# EAGLE board ANAL_2_CPU_REV_1_0B (EAGLE 7.6.0)
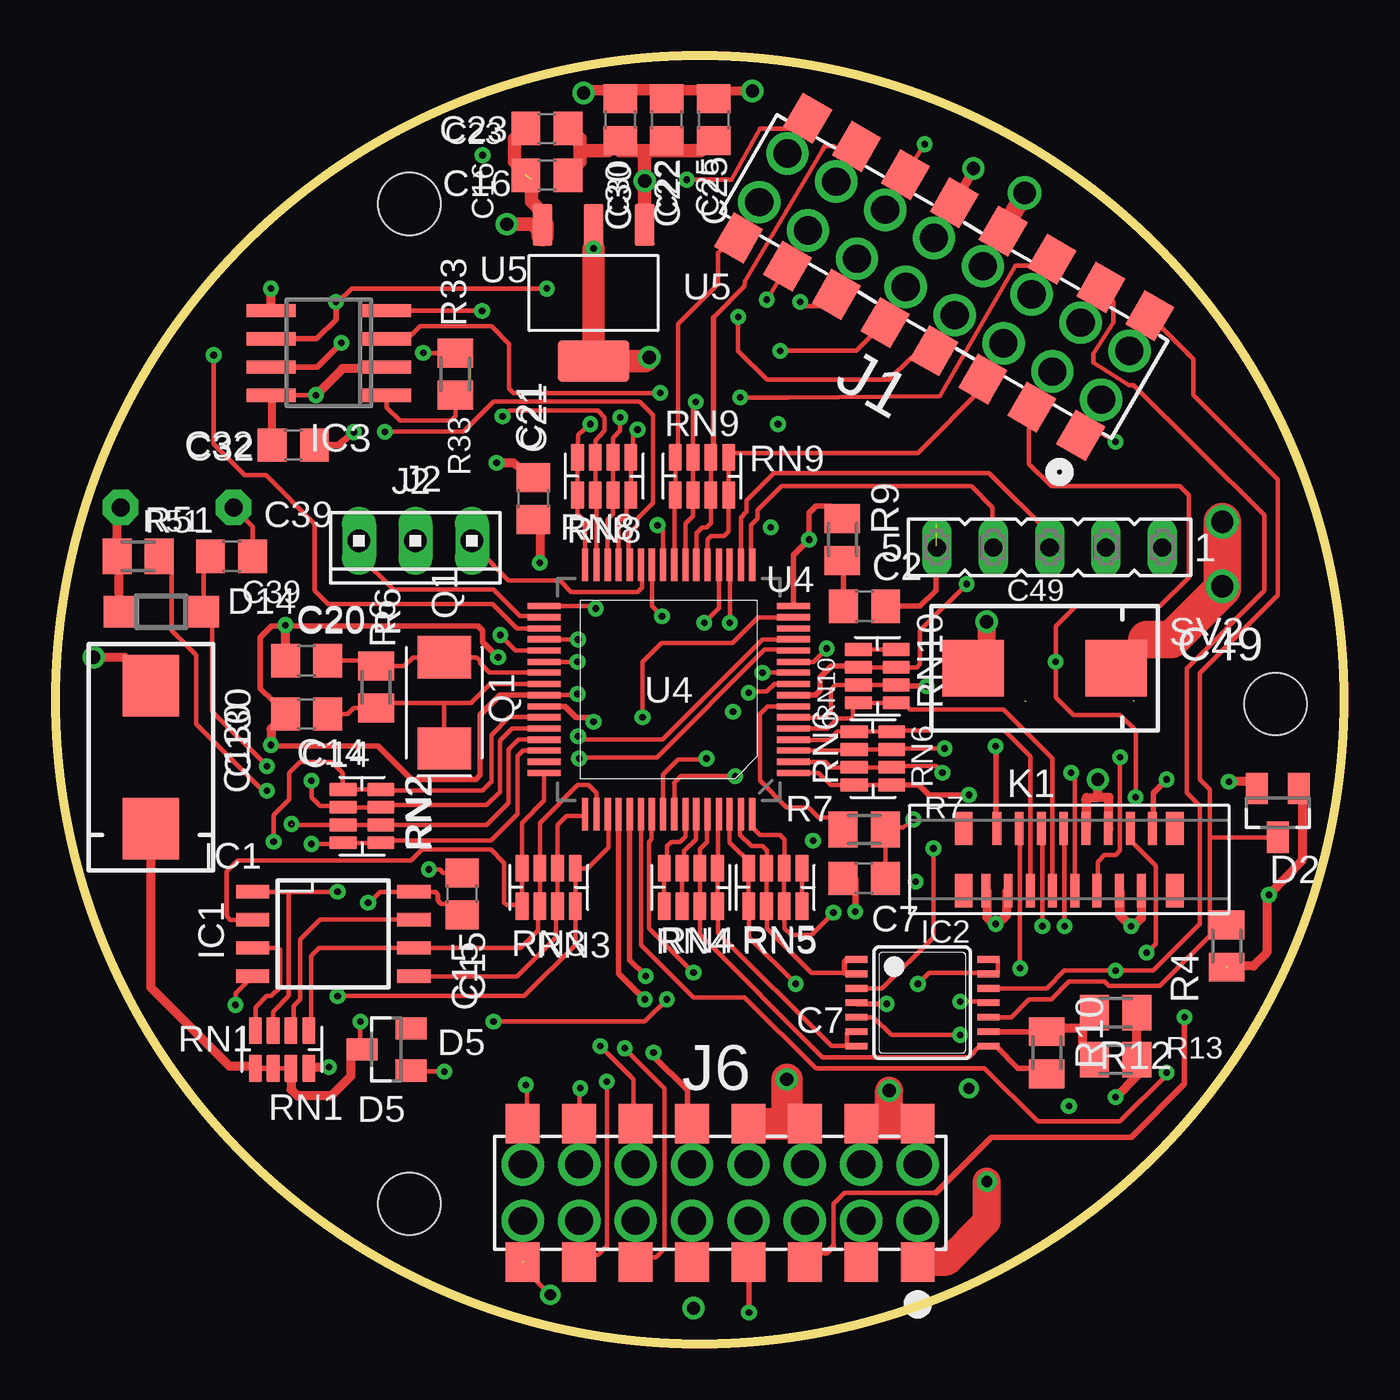
[diagram p0: board, top side]
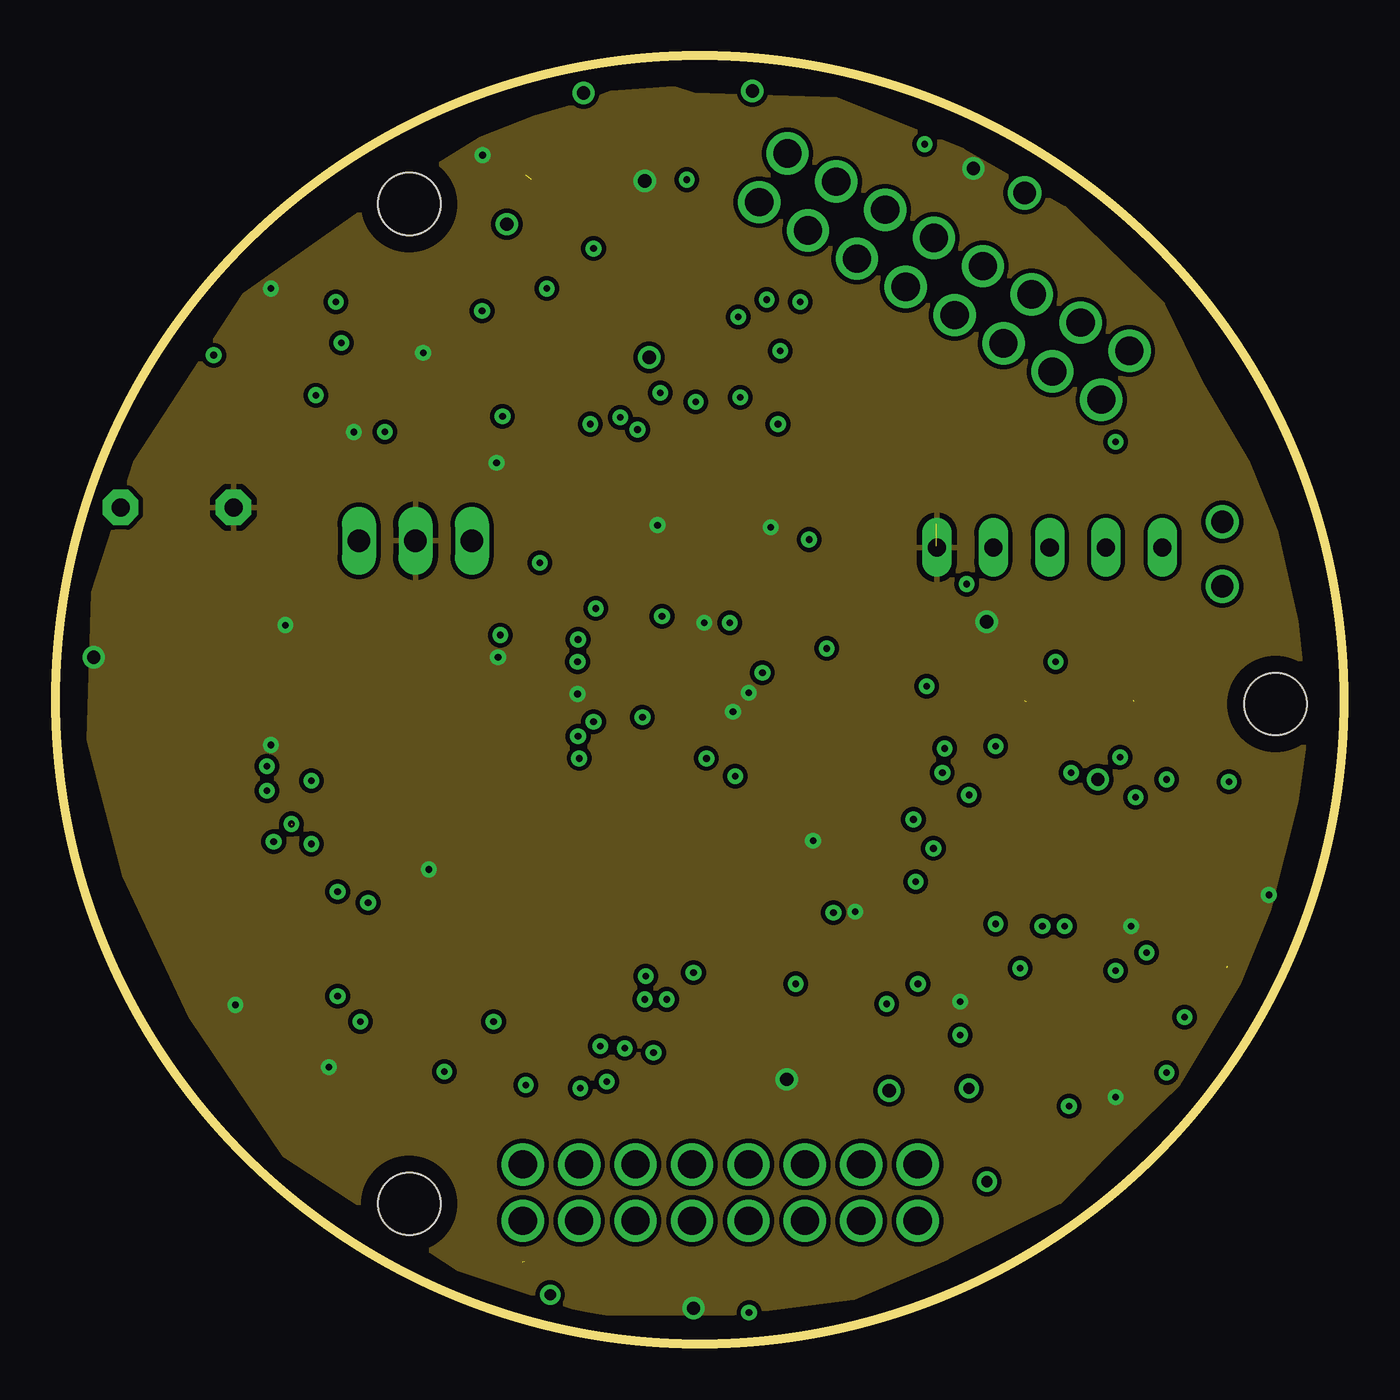
[diagram p1: board, inner layer GND]
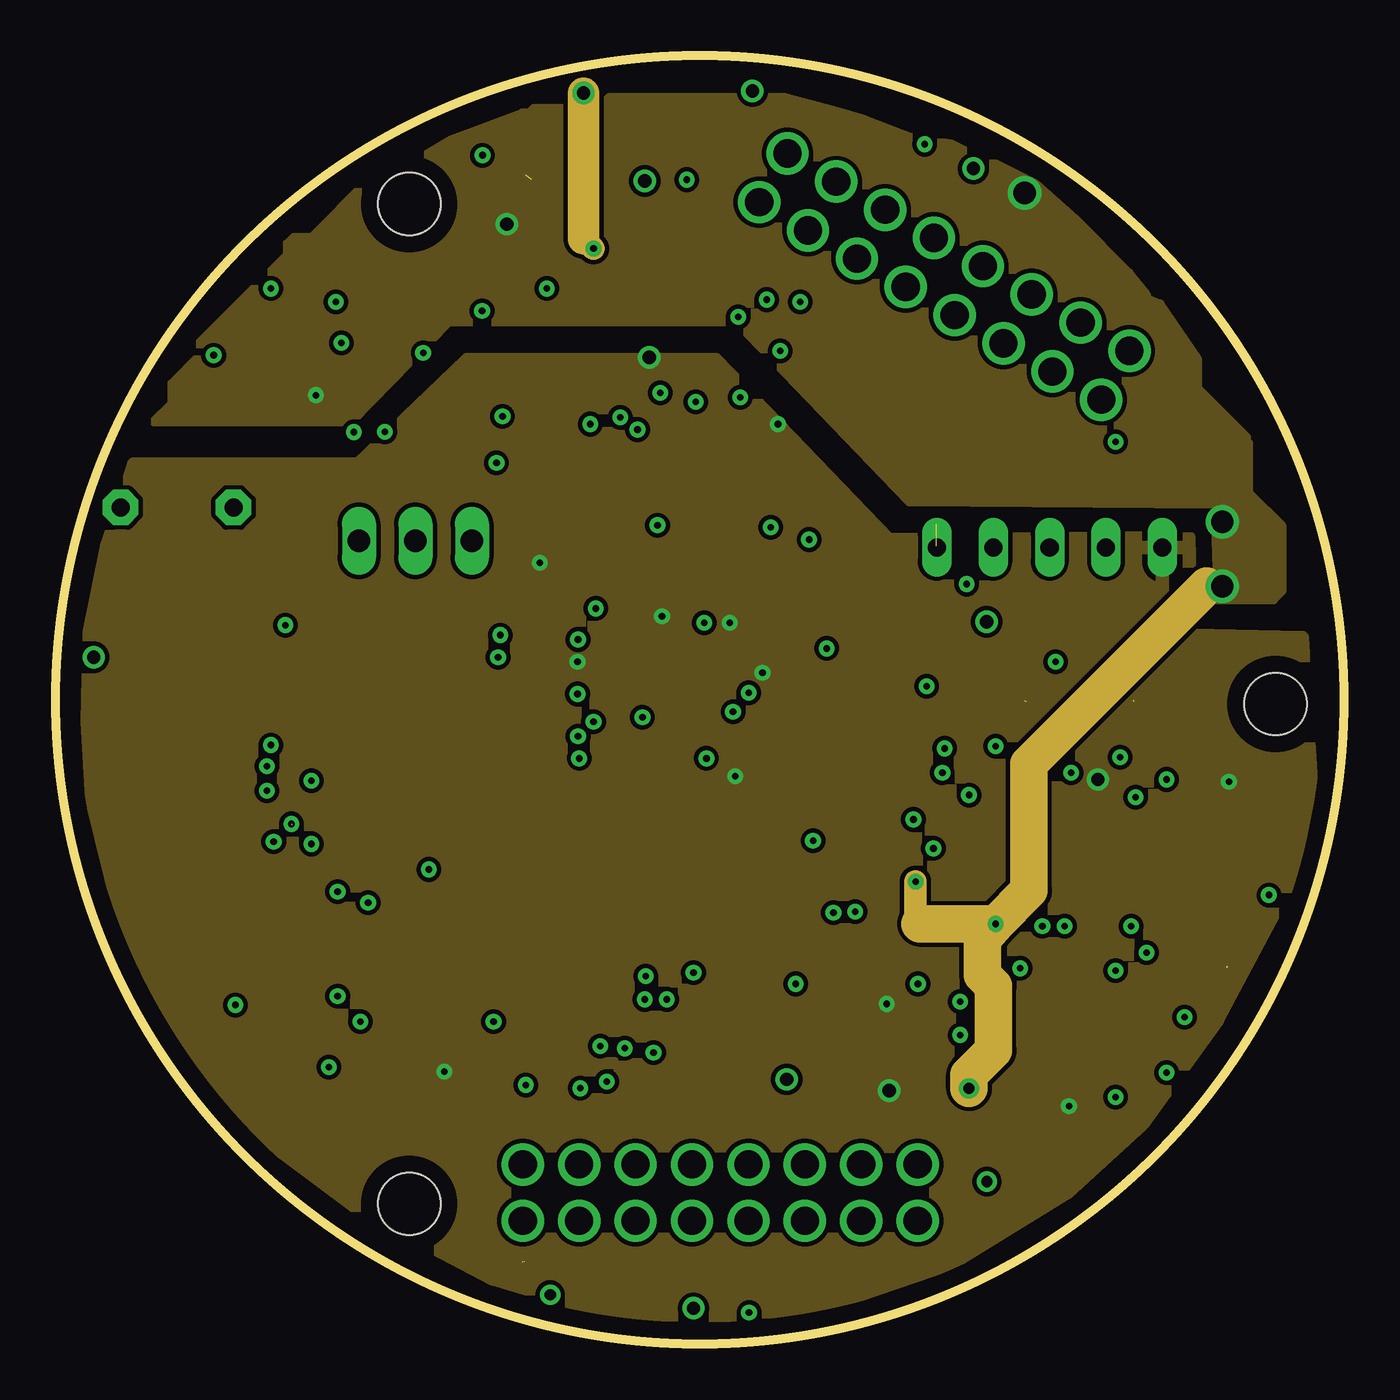
[diagram p2: board, inner layer 3V3&5V]
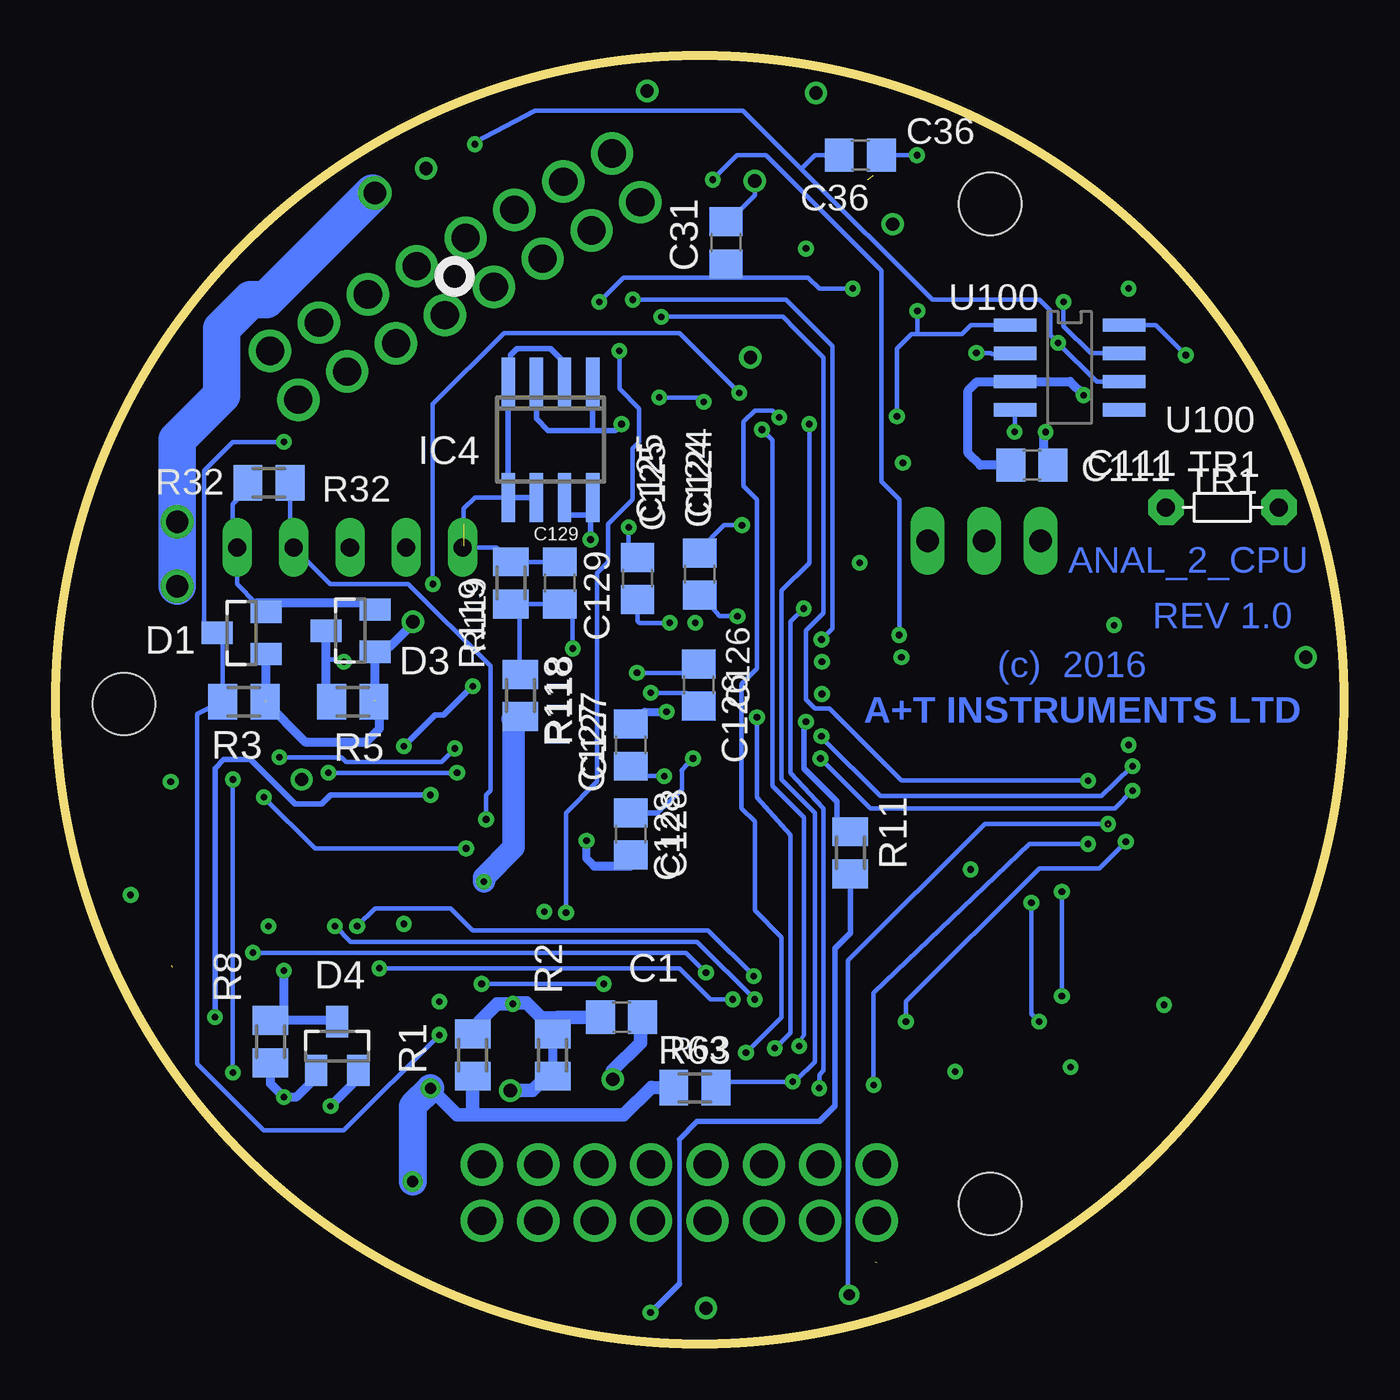
[diagram p3: board, bottom side, seen from below]

Size 58 x 58 mm. Coordinates in mm from the lower left corner, seen from the top.
Outline: circle at 29,29 radius 29
Copper layers (1*2*15*16): Top-VerticalRoutes 0.035mm / dielectric 0.5mm / GND 0.035mm / dielectric 0.5mm / 3V3&5V 0.035mm / dielectric 0.5mm / BottomnHorizontalroutes 0.035mm
Design rules "default *": minimum track width 0.2mm, minimum drill 0.3mm, track to track 6mil, track to pad 6mil, pad to pad 6mil, via to via 6mil, smd to smd 6mil, copper to edge 30mil, drill to drill 8mil, minimum pad ring 10mil, minimum via ring 8mil, stop-mask expansion 4mil, vias tented up to drill 0.31mm, thermal gap 10mil
Net classes: 0 default: width 0.2 mm, drill 0.2 mm, clearance 0.2 mm; 1 GND: width 0.2 mm, drill 0.2 mm, clearance 0.2 mm to class 0, clearance 0.2 mm; 2 5V: width 0.2 mm, drill 0.2 mm, clearance 0.2 mm to class 0, clearance 0.2 mm; 3 3v3: width 0.2 mm, drill 0.2 mm, clearance 0.2 mm to class 0, clearance 0.2 mm to class 1, clearance 0.2 mm to class 2, clearance 0.2 mm
Holes 2.8 mm at 15.92,51.31 15.92,6.31 54.92,28.81
tKeepout: 1 lines

## Footprints (pad centres in the part's own frame; a part is rotated, then mirrored left to right if it is on the bottom)
C0805 = smd 1.3 x 1.5: 1 -0.95,0; 2 0.95,0
CAPC7343X31 = smd 2.77 x 2.55: + 3.22,0; - -3.22,0
SOT23 = smd 1 x 1.4: 1 -0.95,-1.1; 2 0.95,-1.1; 3 0,1.1
SOD123 = smd 1.4 x 1.4: A 1.9,0; C -1.9,0
SOIC127P794203-L25N = smd 0.6 x 1.5: 1 -1.905,-3.63; 2 -0.635,-3.63; 3 0.635,-3.63; 4 1.905,-3.63; 5 1.905,3.63; 6 0.635,3.63; 7 -0.635,3.63; 8 -1.905,3.63
TSSOP14-RU = smd 0.305 x 0.991: 1 -1.95,-2.968; 2 -1.3,-2.968; 3 -0.65,-2.968; 4 0,-2.968; 5 0.65,-2.968; 6 1.3,-2.968; 7 1.95,-2.968; 8 1.95,2.968; 9 1.3,2.968; 10 0.65,2.968; 11 0,2.968; 12 -0.65,2.968; 13 -1.3,2.968; 14 -1.95,2.968
SO-08 = smd 0.6 x 2.2: 1 -1.905,-2.6; 2 -0.635,-2.6; 3 0.635,-2.6; 4 1.905,-2.6; 5 1.905,2.6; 6 0.635,2.6; 7 -0.635,2.6; 8 -1.905,2.6
CONN-16WAY-DV-BE = smd 1.524 x 1.778: 1 22.86,-6.223; 2 22.86,0; 3 20.32,-6.223; 4 20.32,0; 5 17.78,-6.223; 6 17.78,0; 7 15.24,-6.223; 8 15.24,0; 9 12.7,-6.223; 10 12.7,0; 11 10.16,-6.223; 12 10.16,0; 13 7.62,-6.223; 14 7.62,0; 15 5.08,-6.223; 16 5.08,0 | drill 1.27 pad 1.524: 21 22.86,-4.369; 22 22.86,-1.829; 23 20.32,-4.369; 24 20.32,-1.829; 25 17.78,-4.369; 26 17.78,-1.829; 27 15.24,-4.369; 28 15.24,-1.829; 29 12.7,-4.369; 30 12.7,-1.829; 31 10.16,-4.369; 32 10.16,-1.829; 33 7.62,-4.369; 34 7.62,-1.829; 35 5.08,-4.369; 36 5.08,-1.829
10X03MTA = drill 1.016 long: 1 2.54,0; 2 0,0; 3 -2.54,0
687316124422 = smd 0.4 x 1.5: 1 -3.54,-1.4; 2 -3.04,1.4; 3 -2.54,-1.4; 4 -2.04,1.4; 5 -1.54,-1.4; 6 -1.04,1.4; 7 -0.54,-1.4; 8 -0.04,1.4; 9 0.46,-1.4; 10 0.96,1.4; 11 1.46,-1.4; 12 1.96,1.4; 13 2.46,-1.4; 14 2.96,1.4; 15 3.46,-1.4; 16 3.96,1.4 | smd 0.8 x 1.5: Z1 -4.54,1.4; Z2 -4.54,-1.4; Z3 4.96,-1.4; Z4 4.96,1.4
ABRACON-ABM3 = smd 1.9 x 2.4: 1 -2.05,0; 2 2.05,0
M0805 = smd 1.3 x 1.6: 1 -0.95,0; 2 0.95,0
RESCAV80P325X165X90-8M = smd 0.6 x 1.22: 1 -1.2,-0.85; 2 -0.4,-0.85; 3 0.4,-0.85; 4 1.2,-0.85 | smd 0.6 x 1.25: 5 1.2,0.85; 6 0.4,0.85; 7 -0.4,0.85; 8 -1.2,0.85
RESCAV80P325X165X90-8M-SHORTED = smd 0.6 x 1.22: 1 -1.2,-0.85; 2 -0.4,-0.85; 3 0.4,-0.85; 4 1.2,-0.85 | smd 0.6 x 1.25: 5 1.2,0.85; 6 0.4,0.85; 7 -0.4,0.85; 8 -1.2,0.85
FE05-1 = drill 0.813 long: 1 -5.08,0; 2 -2.54,0; 3 0,0; 4 2.54,0; 5 5.08,0
R-5 = drill 0.813 pad 1.6 octagon: 1 -2.54,0; 2 2.54,0
QFP64-10X10MC = smd 1.473 x 0.279: 1 -5.613,3.759; 2 -5.613,3.251; 3 -5.613,2.743; 4 -5.613,2.261; 5 -5.613,1.753; 6 -5.613,1.245; 7 -5.613,0.762; 8 -5.613,0.254; 9 -5.613,-0.254; 10 -5.613,-0.762; 11 -5.613,-1.245; 12 -5.613,-1.753; 13 -5.613,-2.261; 14 -5.613,-2.743; 15 -5.613,-3.251; 16 -5.613,-3.759; 33 5.613,-3.759; 34 5.613,-3.251; 35 5.613,-2.743; 36 5.613,-2.261; 37 5.613,-1.753; 38 5.613,-1.245; 39 5.613,-0.762; 40 5.613,-0.254; 41 5.613,0.254; 42 5.613,0.762; 43 5.613,1.245; 44 5.613,1.753; 45 5.613,2.261; 46 5.613,2.743; 47 5.613,3.251; 48 5.613,3.759 | smd 0.279 x 1.473: 17 -3.759,-5.613; 18 -3.251,-5.613; 19 -2.743,-5.613; 20 -2.261,-5.613; 21 -1.753,-5.613; 22 -1.245,-5.613; 23 -0.762,-5.613; 24 -0.254,-5.613; 25 0.254,-5.613; 26 0.762,-5.613; 27 1.245,-5.613; 28 1.753,-5.613; 29 2.261,-5.613; 30 2.743,-5.613; 31 3.251,-5.613; 32 3.759,-5.613; 49 3.759,5.613; 50 3.251,5.613; 51 2.743,5.613; 52 2.261,5.613; 53 1.753,5.613; 54 1.245,5.613; 55 0.762,5.613; 56 0.254,5.613; 57 -0.254,5.613; 58 -0.762,5.613; 59 -1.245,5.613; 60 -1.753,5.613; 61 -2.261,5.613; 62 -2.743,5.613; 63 -3.251,5.613; 64 -3.759,5.613
SOT230P700X180-4L = smd 0.89 x 1.88: 1 -2.3,-3.065; 2 0,-3.065; 3 2.3,-3.065 | smd 3.23 x 1.88: 4 0,3.065
SOIC127P600X175-8L87N = smd 0.6 x 1.91: 1 -1.905,-2.46; 2 -0.635,-2.46; 3 0.635,-2.46; 4 1.905,-2.46; 5 1.905,2.46; 6 0.635,2.46; 7 -0.635,2.46; 8 -1.905,2.46

## Placement (x,y rotation side)
C1  100n  [C0805]  32.52,14.71 0 bottom
C2  2.2u  [C0805]  36.42,33.21 0 top
C7  1n  [C0805]  36.4,20.96 180 top
C14  18p  [C0805]  11.3,28.36 180 top
C15  100n  [C0805]  18.3,20.26 90 top
C16  100n  [C0805]  22.12,52.61 0 top
C20  18p  [C0805]  11.3,30.76 180 top
C21  100n  [C0805]  21.5,38.06 90 top
C22  22u  [C0805]  27.52,55.11 90 top
C23  10u  [C0805]  22.12,54.71 180 top
C25  100n  [C0805]  29.64,55.11 270 top
C30  22u  [C0805]  25.42,55.11 90 top
C31  1n  [C0805]  27.82,49.57 90 bottom
C32  100n  [C0805]  10.7,40.46 0 top
C36  1n  [C0805]  21.77,53.51 0 bottom
C39  100n  [C0805]  7.92,35.46 0 top
C49  100u  [CAPC7343X31]  44.52,30.41 0 top
C111  100n  [C0805]  14.05,39.56 0 bottom
C124  100n  [C0805]  29,34.66 270 bottom
C125  100n  [C0805]  31.8,34.46 90 bottom
C126  100n  [C0805]  29.04,29.66 90 bottom
C127  100n  [C0805]  32.1,26.96 90 bottom
C128  10u  [C0805]  32.1,22.96 270 bottom
C129  100n  [C0805]  35.3,34.26 90 bottom
C130  100u  [CAPC7343X31]  4.29,26.41 270 top
D1  BAS70-04  [SOT23]  49.62,32.01 90 bottom
D2  BAS70-04  [SOT23]  55.02,23.91 180 top
D3  BAS70-04  [SOT23]  44.72,32.11 90 bottom
D4  BAS70-04  [SOT23]  45.32,13.41 0 bottom
D5  BAT54  [SOT23]  14.9,13.26 90 top
D14  MBR0530  [SOD123]  4.76,32.96 180 top
E$2  [PASS-ROUND]  68.92,28.81 0 top  (outside the outline)
E$3  [PASS-ROUND]  28.92,68.81 0 top  (outside the outline)
IC1  SST26VF064B  [SOIC127P794203-L25N]  12.5,18.46 270 top
IC2  TLV4314  [TSSOP14-RU]  39.02,15.36 270 top
IC3  SN65176D  [SO-08]  12.3,44.61 90 top
IC4  MCP1501T-25E/SN  [SO-08]  35.72,40.71 180 bottom
J1  AMP 969973-8  [CONN-16WAY-DV-BE]  29.46,57.72 330 top
J2  1X3  [10X03MTA]  16.2,36.16 180 top
J6  AMP 969973-8  [CONN-16WAY-DV-BE]  15.95,9.91 0 top
K1  Molex 52559-1652  [687316124422]  45.42,21.81 0 top
Q1  12MHz  [ABRACON-ABM3]  17.5,28.86 90 top
R1  DNF  [M0805]  39.22,13.01 90 bottom
R2  DNF  [M0805]  35.62,13.01 90 bottom
R3  39k ,0.1%  [M0805]  49.52,28.91 180 bottom
R4  DNF  [M0805]  52.72,17.91 90 top
R5  39k, 0.1%  [M0805]  44.62,28.91 180 bottom
R6  1M  [M0805]  14.43,29.57 270 top
R7  100R  [M0805]  36.4,23.16 0 top
R8  39k, 0.1%  [M0805]  48.32,13.61 90 bottom
R9  1M  [M0805]  35.42,36.21 270 top
R10  100k, 0.1%  [M0805]  44.62,13.11 270 top
R11  100R  [M0805]  22.22,22.11 270 bottom
R12  39k, 0.1%  [M0805]  47.72,14.91 180 top
R13  39k, 0.1%  [M0805]  47.72,12.81 180 top
R32  10K  [M0805]  48.39,38.76 180 bottom
R33  10k  [M0805]  18,43.66 90 top
R51  10k  [M0805]  3.72,35.46 180 top
R63  10k  [M0805]  29.22,11.53 0 bottom
R118  10k  [M0805]  37.07,29.19 90 bottom
R119  10k  [M0805]  37.5,34.26 270 bottom
RN1  10k  [RESCAV80P325X165X90-8M]  10.2,13.26 180 top
RN2  100R  [RESCAV80P325X165X90-8M-SHORTED]  13.8,23.76 90 top
RN3  100R  [RESCAV80P325X165X90-8M-SHORTED]  22.2,20.56 180 top
RN4  100R  [RESCAV80P325X165X90-8M-SHORTED]  28.6,20.56 180 top
RN5  100R  [RESCAV80P325X165X90-8M-SHORTED]  32.4,20.56 180 top
RN6  DNF  [RESCAV80P325X165X90-8M-SHORTED]  36.8,26.36 90 top
RN8  100R  [RESCAV80P325X165X90-8M-SHORTED]  24.7,39.06 180 top
RN9  100R  [RESCAV80P325X165X90-8M-SHORTED]  29.1,39.06 180 top
RN10  100R  [RESCAV80P325X165X90-8M-SHORTED]  37,30.06 90 top
SV2  NOT FITTED  [FE05-1]  44.75,35.86 180 top
TR1  HCZ-D5-A  [R-5]  5.47,37.66 180 bottom
U4  dsPIC33EP512MC806  [QFP64-10X10MC]  27.6,29.46 180 top
U5  AP1117  [SOT230P700X180-4L]  24.22,47.31 180 top
U100  MCP2551  [SOIC127P600X175-8L87N]  12.35,43.96 270 bottom

## Library data of the parts
C1 C2 C7 C14-C16 C20-C23 C25 C30-C32 C36 C39 C111 C124-C129 R1-R13 R32 R33 R51 R63 R118 R119 = rcl
C49 C130 = Capacitors_AandT; DIGIKEY: 399-12105-1-ND; MANUFACTURER: Kemet; MOUSER: 80-T598D107M016E050; MPN: T598D107M016ATE050; PACKAGE: 7343; VOLTAGE: 16V
D1-D5 D14 = diode
E$2 E$3 = marks
IC1 = microchip; MF: MICROCHIP; MOUSER: 579-ST26VF064B104ISM; MPN: 25AA080/SN; OC_FARNELL: 1816072; OC_NEWARK: 92C7351
IC2 IC4 = AWR
IC3 = texas; MF: TEXAS INSTRUMENTS; MPN: SN65176BD; OC_FARNELL: 9589970; OC_NEWARK: 08F5891
J1 J6 = AWR; MPN: 969973-8; OC_FARNELL: 9689788; PACKAGE: .025 SOCKET STRIPS 2X10WAYS; SUPPLIER: AMP
J2 = con-amp
K1 = Wurth_FPC_ConnectorsFlat_Flexible_Cable_rev15c
Q1 = Crystals_AnT; FARNELL: 2101327
RN1 = Resistor-AandT; FARNELL: 2060167; MANUFACTURER: PANASONIC
RN2-RN6 RN8-RN10 = Resistor-AandT; FARNELL: 2060157; MANUFACTURER: PANASONIC; MPN: EXBV8V101JV; RS: 665-2887
SV2 = con-lsta; OC_FARNELL: unknown; OC_NEWARK: unknown
TR1 = discrete
U4 = dsPIC33EP256MU806; FARNELL: 2425985; MANUFACTURER: MICROCHIP; MOUSER: DSPIC33EP512MC806-I/PT-ND; PACKAGE: TQFP-64
U5 = ICs_AandT; FARNELL: 1825291; MANUFACTURER: DIODES INC; MPN: AP1117 E33G-13; PACKAGE: SOT223-3; RS: 751-2890
U100 = Microchip_AandT; FARNELL: 1467746; MANUFACTURER: MICROCHIP; MFN: MCP2551-E/SN; MOUSER: 579-MCP2551-E/SN; PACKAGE: SOIC-8

## Nets
!CE_FL: IC1.1 RN1.3 RN3.8
+3V3 [3v3]: C1.1 C21.1 C22.2 C25.1 C30.2 C124.2 C125.1 C126.2 C127.1 D1.2 D2.2 D3.2 D4.2 D5.1 IC2.4 IC4.1 IC4.3 J6.2 J6.4 K1.10 K1.12 R1.2 R2.1 R2.2 R32.2 SV2.1 U4.10 U4.19 U4.26 U4.38 U4.57 U5.4
+5V [5V]: C16.1 C23.2 C32.1 C49.+ C111.1 IC3.2 IC3.8 J1.8 J6.1 K1.1 K1.3 R1.1 R63.1 R118.1 U5.3 U100.3
BLUETOOTH_PWR: K1.4 RN2.5
CAN-RX: U4.28 U100.4
CAN-SLEEP: U4.35 U100.8
CK_STEP: K1.5 RN6.4
CLK_FL: IC1.6 RN1.1 RN3.6
DI_STEP: K1.7 RN10.1
DO_STEP: K1.2 RN10.2
EEPROM3V3 [3v3]: C15.1 C130.+ D5.3 IC1.8 RN1.5 RN1.6 RN1.7
GND [GND]: C1.2 C2.2 C7.2 C14.2 C15.2 C16.2 C20.2 C21.2 C22.1 C23.1 C25.2 C30.1 C31.2 C32.2 C36.2 C39.2 C49.- C111.2 C124.1 C125.2 C126.1 C127.2 C128.2 C129.2 C130.- D1.1 D2.1 D3.1 D4.1 IC1.4 IC2.11 IC3.5 IC4.2 IC4.4 IC4.5 IC4.6 J1.10 J2.2 J6.6 J6.8 K1.13 K1.15 R3.1 R4.1 R5.1 R8.1 R12.1 R13.1 R33.2 R119.1 RN1.8 SV2.5 TR1.2 U4.9 U4.20 U4.25 U4.41 U5.1 U100.2
HI-2-SET-RELAYS: J1.13 U4.36
HI-4-RELAY-RESET: J1.16 U4.37
ID: C129.1 R118.2 R119.2 U4.11
KB3: D1.3 IC2.5 J1.1 R3.2
KEY_BT: K1.6 U4.53
MCLR: C7.1 R7.2 R32.1 SV2.2
MR_STEP: K1.11 RN6.3
N$4: IC2.9 R10.1 R12.2 R13.2
N$5: RN5.2 U4.64
N$6: J6.7 R11.2
N$7: IC2.6 IC2.7 RN4.8
N$8: IC1.7 RN1.2
N$9: D2.3 IC2.10 J1.2 R4.2
N$10: C128.1 U4.56
N$11: D4.3 IC2.12 J1.4 R8.2
N$13: IC2.8 R10.2 RN4.7
N$14: IC2.1 IC2.2 RN5.6
N$15: IC2.13 IC2.14 RN5.5
N$16: RN2.4 U4.43
N$17: R7.1 U4.7
N$18: C14.1 Q1.1 R6.2 U4.40
N$19: D3.3 IC2.3 J1.3 R5.2
N$22: RN10.6 U4.8
N$26: C2.1 R9.2
N$34: R51.1 U4.12
N$35: D14.A R51.2 TR1.1
N$39: C20.1 Q1.2 R6.1 U4.39
N$42: IC1.3 RN1.4
N$46: C39.1 D14.C U4.13
N$48: RN3.2 U4.49
N$49: RN3.3 U4.50
N$62: IC3.1 R33.1
N$108: RN8.8 U4.29
N$109: RN8.7 U4.30
N$110: RN8.6 U4.31
N$111: RN8.5 U4.32
N$116: RN3.1 U4.51
N$119: RN3.4 U4.48
N$124: RN6.7 U4.2
N$125: RN6.6 U4.3
N$126: RN6.5 U4.4
N$127: RN6.8 U4.1
N$128: RN10.8 U4.5
N$129: RN10.7 U4.6
N$130: RN9.8 U4.21
N$131: RN9.7 U4.22
N$132: RN9.6 U4.23
N$133: RN9.5 U4.24
N$134: RN4.1 U4.61
N$135: RN4.2 U4.60
N$136: RN4.3 U4.59
N$137: RN4.4 U4.58
N$139: RN5.3 U4.63
N$140: RN5.4 U4.62
N$921: RN2.2 U4.45
N$931: RN2.3 U4.44
N$9121: RN2.1 U4.46
NEMATX: IC3.4 RN8.3 U100.1
NETBUSY: J6.16 RN2.8
NETRX: J6.15 RN2.7
NETTX: J6.13 R63.2 RN8.4
NMEA1: J1.7 RN2.6
NMEA-OUT-A: C31.1 IC3.6 J1.11 U100.7
NMEA-OUT-B: C36.1 IC3.7 J1.12 U100.6
NMEA_EN: IC3.3 RN10.3
PGC: SV2.4 U4.17
PGD: SV2.3 U4.18
PHY-POWER: J6.11 U4.15
PHY_CS: J6.12 RN8.1
PHY_INT: R11.1 U4.42
PHY_SCK: J6.14 U4.33
PHY_SI: J6.5 RN6.1
PHY_SO: J6.10 RN8.2
RB8: J1.5 RN9.1
RB9: J1.14 RN9.2
RB10: J1.6 RN9.3
RB11: J1.15 RN9.4
ROTARY_SW: J1.9 RN5.7
RST_BT: K1.8 U4.52
RX-FROM-TERMINAL: J2.3 U4.27
RX_BT: K1.16 U4.54
SI_FL: IC1.5 RN3.7
SO_FL: IC1.2 RN3.5
SS_STEP: K1.9 RN6.2
TX-TO-TERMINAL: J2.1 U4.34
TX_BT: K1.14 U4.55
VREF: IC4.7 IC4.8 R9.1 U4.16
Z-MEASURE: U4.14

## Tracks (layer width: path | path; a pad name or v marks a point on that pad's centre or on a via)
!CE_FL  (via drill 0.3)
  Top-VerticalRoutes 0.2: RN3.8 23.4,17.96 21.1,15.66 v12.7,15.66 | RN1.3 9.8,14.96 10.5,15.66 10.5,20.36 | v12.7,20.36 10.5,20.36 | 10.5,20.36 IC1.1
  BottomnHorizontalroutes 0.2: v12.7,15.66 v12.7,20.36
+3V3  (via drill 0.3, 0.6)
  Top-VerticalRoutes 0.2: U4.57 27.85,25.26 28.15,25.56 v30.6,25.56 | v27.3,32.76 26.85,33.21 U4.26 | U4.38 v23.5,30.7 | v30.35,32.46 U4.19 | D5.1 16.05,12.26 v17.5,12.26 | C21.1 21.8,36.91 | U4.10 31.83,30.22 v31.82,30.21
  Top-VerticalRoutes 0.254: IC2.4 36.1,15.31 v37.42,15.31
  Top-VerticalRoutes 0.406: 21.8,36.91 v21.8,35.16 | C30.2 | C25.1 29.52,56.06 29.12,56.46 27.92,56.46 C22.2 27.52,56.51 25.87,56.51 C30.2 | C30.2 25.42,56.41 25.47,56.46 24.02,56.46 v23.77,56.31 23.92,56.31 24.02,56.41 v31.37,56.41 31.42,56.41 | K1.12 47.42,23.21 47.42,24.61 46.92,24.61 | 46.42,24.61 46.38,24.51 K1.10 46.42,23.21 46.42,24.61 | 46.42,24.61 46.92,24.61 | 46.92,24.61 v46.92,25.41 | D2.2 54.27,25.31 v52.82,25.31
  Top-VerticalRoutes 1.016: v24.22,49.31 U5.4 26.56,44.25 v26.72,44.41
  Top-VerticalRoutes 1.27: 37.52,9.91 v37.52,11.41
  Top-VerticalRoutes 1.422: J6.4 37.52,9.91 J6.2
  3V3&5V 1.016: v24.22,49.31 23.77,49.76
  3V3&5V 1.422: 23.77,49.76 v23.77,56.31
  BottomnHorizontalroutes 0.2: C124.2 28.35,33.06 28.1,32.76 v27.3,32.76 | v30.35,32.46 31.72,32.46 31.8,32.54 C125.1 | C127.1 31.75,25.61 32.02,25.61 32.02,25.56 v30.6,25.56 | v31.82,30.21 29.44,30.21 C126.2 | R32.2 49.34,38.49 50.02,37.81 50.02,36.05 SV2.1 49.82,35.45 49.82,34.21 49,33.35 D1.2
  BottomnHorizontalroutes 0.254: IC4.3 36.32,42.87 36.32,42.81 | IC4.3 36.22,42.87 | 33.82,41.11 35.82,41.11 36.36,41.64 IC4.3 | 33.82,41.11 33.82,42.87 IC4.1 | 33.82,41.11 32.82,41.11 v32.52,41.41 | v37.42,15.31 37.51,15.09
  BottomnHorizontalroutes 0.406: 49,33.35 44.21,33.35 43.92,33.06 D3.2 | D4.2 44.62,12.06 44.62,11.71 v45.62,10.71 | R2.2 R2.1
  BottomnHorizontalroutes 0.61: R2.1 35.87,12.06 36.52,11.41 v37.52,11.41 | R2.2 36.12,14.68 | 36.12,14.68 36.8,15.36 37.37,15.36 v37.42,15.31 38.12,15.31 38.92,14.51 R1.2 | C1.1 35.4,14.71 36.12,14.68
  pour 3V3&5V: 51.02,36.31 37.52,36.21 29.72,44.31 18.52,44.31 13.62,39.61 3.52,39.61 2.32,36.01 1.52,32.01 1.42,28.01 1.62,24.51 2.92,19.31 4.72,14.81 7.02,11.51 10.22,8.61 13.42,6.21 19.72,2.91 24.32,1.51 29.32,0.81 33.62,1.31 40.32,3.61 45.52,6.81 48.92,9.91 52.32,14.61 55.62,20.81 56.52,25.31 56.22,30.31 56.12,31.81 51.12,31.91
+5V  (via drill 0.3, 0.5, 0.6, 1)  (1 unrouted)
  Top-VerticalRoutes 0.2: 9.75,42.66 IC3.8 v11.72,42.71
  Top-VerticalRoutes 0.35: C32.1 9.75,42.66
  Top-VerticalRoutes 0.406: C23.2 21.17,54.76 20.67,54.26 | 20.67,53.21 C16.1 | IC3.2 14.84,43.91 12.92,43.91 v11.72,42.71 | K1.1 41.92,20.41 41.92,19.21 42.22,18.91 v42.32,18.91 42.42,18.91 42.82,19.31 42.82,20.35 K1.3
  Top-VerticalRoutes 0.61: 20.67,54.26 20.67,53.21 | 21.92,49.91 21.42,50.41 v20.32,50.41 | 21.42,52.41 21.42,51.41 21.92,50.91 U5.3
  Top-VerticalRoutes 0.813: J1.8 v43.62,51.81
  Top-VerticalRoutes 1.016: U5.3 21.92,49.91 | C49.+ 47.82,30.41 49.12,31.71 | 52.52,34.01 v52.52,34.11
  Top-VerticalRoutes 1.27: J6.1 40.12,3.71 41.92,5.51 v41.92,7.31
  Top-VerticalRoutes 1.676: 49.12,31.71 50.22,31.71 52.52,34.01 | v52.52,34.11 v52.52,37.01
  3V3&5V 0.813: v42.32,18.91 42.02,19.21 38.72,19.21 v38.72,20.81
  3V3&5V 1.016: v38.72,20.81 38.72,19.11 38.92,18.91 | 51.82,34.11 v52.52,34.11
  3V3&5V 1.676: 38.92,18.91 v42.32,18.91 | v42.32,18.91 43.82,20.41 43.82,26.11 51.82,34.11 | v41.12,11.51 41.12,12.11 42.22,13.21 42.22,16.11 41.72,16.61 41.72,18.21 v42.32,18.91
  BottomnHorizontalroutes 0.406: C111.1 16.37,39.56 16.92,40.11 16.92,42.91 16.52,43.31 14.83,43.31 U100.3 12.34,43.33 v11.72,42.71
  BottomnHorizontalroutes 0.61: R63.1 31.17,11.56 32.42,10.31 39.12,10.31 | R1.1 39.22,10.41 39.12,10.31 | 39.12,10.31 39.92,10.31 v41.12,11.51
  BottomnHorizontalroutes 1.016: v43.62,51.81 43.72,51.81 | 37.42,28.13 37.29,28.26 R118.1 37.38,27.93 37.38,22.35 38.72,21.01 v38.72,20.81
  BottomnHorizontalroutes 1.27: v41.12,11.51 41.92,10.71 v41.92,7.31
  BottomnHorizontalroutes 1.676: v52.52,34.11 52.52,40.71 50.52,42.71 50.52,45.71 49.22,47.01 48.52,47.01 43.72,51.81
  pour 3V3&5V: 4.42,41.51 13.32,41.51 17.72,46.01 30.62,46.01 38.42,37.91 52.22,37.81 52.22,36.21 52.32,33.51 54.82,33.51 55.22,33.91 55.22,36.81 53.72,38.31 53.72,40.51 53.62,40.61 53.62,40.81 51.42,43.01 51.42,44.31 49.72,46.81 49.02,47.11 49.12,47.21 48.32,48.21 45.92,50.61 44.12,52.21 41.92,53.31 41.52,53.41 40.32,54.01 38.52,54.31 36.42,55.11 35.02,55.51 32.82,56.11 24.92,56.11 24.42,55.61 21.52,55.61 21.32,55.41 21.02,55.41 17.82,54.21 14.82,52.41 14.72,52.31 14.02,52.31 11.52,49.81 10.72,49.81 10.42,49.51 10.42,49.01 6.52,45.11 6.52,44.51 5.22,43.21 5.22,42.31
BLUETOOTH_PWR  (via drill 0.3)
  Top-VerticalRoutes 0.2: K1.4 43.42,22.37 v43.42,16.91 43.42,16.81 | RN2.5 12.92,24.99 12.92,25.71 12.42,26.21 11.02,26.21 10.52,25.71 10.52,24.51 9.82,23.81 v9.82,22.61 | v19.72,14.51 26.52,14.51 v27.52,15.51
  BottomnHorizontalroutes 0.2: v43.42,16.91 29.92,16.91 28.52,15.51 v27.52,15.51 | v9.82,22.61 11.02,21.41 13.72,21.41 19.72,15.41 v19.72,14.51
CAN-RX  (via drill 0.3)
  Top-VerticalRoutes 0.2: U4.28 25.8,35.12 25.8,36.46 26.2,36.86 26.2,37.16 26.9,37.86 26.9,41.66 26.9,41.8 26.3,42.41 19.72,42.41 18.37,41.06 v14.82,41.06
  BottomnHorizontalroutes 0.2: U100.4 v14.81,41.07 v14.82,41.06
CAN-SLEEP  (via drill 0.3)
  Top-VerticalRoutes 0.2: U4.35 20.77,32.21 19.67,33.31 12.27,33.31 11.67,33.91 11.67,36.91 9.47,39.11 8.52,39.11 7.12,40.51 v7.12,44.51
  BottomnHorizontalroutes 0.2: U100.8 8.48,45.86 v7.12,44.51
CK_STEP
  Top-VerticalRoutes 0.2: 38.1,27.66 RN6.4 37.7,27.61 42.72,27.61 43.88,26.45 K1.5
CLK_FL
  Top-VerticalRoutes 0.2: RN1.1 11.5,14.21 11.5,17.46 11.87,17.82 IC1.6 20.94,17.82 21.72,18.61 21.72,19.63 RN3.6
DI_STEP
  Top-VerticalRoutes 0.2: RN10.1 38.12,28.91 38.47,28.56 42.67,28.56 44.88,26.35 K1.7
DO_STEP  (via drill 0.3)
  Top-VerticalRoutes 0.2: RN10.2 38.1,29.76
  Top-VerticalRoutes 0.254: v39.22,29.61 37.9,29.61 RN10.2 | K1.2 42.32,23.27 v42.32,26.91
  BottomnHorizontalroutes 0.254: v39.22,29.61 40.52,28.31 40.92,28.31 v42.32,26.91
EEPROM3V3  (via drill 0.3)
  Top-VerticalRoutes 0.2: RN1.6 RN1.7 | IC1.8 | IC1.8 17.07,20.36 | 17.07,20.36 17.1,20.36 17.2,20.26 17.2,19.96 17.35,19.81 | 18.05,19.31 C15.1 17.6,19.81 17.35,19.81 | 17.35,19.81 17.35,19.83 17.22,19.96 17.22,20.21 17.07,20.36 | IC1.8 14.62,20.36 14.07,19.81 v14.07,19.86 | v13.72,14.51 13.72,13.34 D5.3
  Top-VerticalRoutes 0.25: RN1.5 RN1.6
  Top-VerticalRoutes 0.406: RN1.7 10.6,11.46 10.9,11.16 12.4,11.16 13.3,12.06 13.3,13.26 D5.3 | C130.+ 4.29,16.04 7.82,12.51 8.9,12.51 RN1.5
  BottomnHorizontalroutes 0.2: v14.07,19.86 14.07,14.86 v13.72,14.51
GND  (via drill 0.3, 0.6)  (4 unrouted)
  Top-VerticalRoutes 0.2: U4.41 23.55,29.21 v23.5,29.26 | U4.9 32.35,29.71 32,29.36 31.25,29.36 v31.2,29.31 | IC1.4 8.1,15.79 v8.1,15.26 | v16.55,44.61 R33.2 | 35.95,21.16 C7.2 | C15.2 17.45,21.21 17.3,21.36 v16.8,21.36 | 27.3,34.96 arc-45 U4.25 27.35,36.61 v27.1,36.86 | U4.20 29.86,33.12 v29.2,32.46 | C39.2 8.87,36.8 TR1.2 | IC2.11 41.94,15.41 v40.72,15.41
  Top-VerticalRoutes 0.254: C2.2 38.92,33.21 39.62,33.91 39.62,35.81 SV2.5 | U4.41 20.02,29.21 19.12,28.31 19.12,25.61 18.92,25.41 16.02,25.41 14.52,26.91 9.72,26.91 9.72,27.04 v9.7,26.96 | C14.2 10.35,28.41 9.22,29.51 9.22,31.81 9.72,32.31 19.02,32.31 19.22,32.11 19.22,31.61 v19.92,30.91
  Top-VerticalRoutes 0.3: v13.43,41.05 12.71,40.46 C32.2 | v36,19.46 36,20.93 35.72,21.21 35.95,21.16
  Top-VerticalRoutes 0.406: C14.2 9.72,27.71 9.7,27.69 v9.7,26.96 | C20.2 v10.35,32.36 | IC3.5 v9.7,47.51 | C21.2 20.6,39.66 v19.85,39.66 | v12.3,12.46 11.6,12.46 11.55,12.41 RN1.8 | J1.10 41.37,52.91 v41.32,52.91 | C130.- 4.29,29.94 3.22,30.81 3.12,30.91 v1.72,30.91 | 25.42,53.71 C30.1 | 29.03,53.71 C25.2 | C22.1 28.02,53.71 | C16.2 23.12,52.71 23.62,53.21 | 23.62,54.26 C23.1 | C49.- 41.92,31.03 | D2.1 55.97,24.86 56.12,24.51 56.12,21.76 v54.62,20.21 54.52,20.21 54.52,17.61 53.92,17.01 52.77,17.01 | K1.15 48.88,19.17 48.52,18.81 v48.42,18.81 47.92,19.31 | 47.92,19.31 47.92,20.37 K1.13 47.88,19.35 47.92,19.31 | v47.72,11.11 48.67,12.06 R13.1 R12.1
  Top-VerticalRoutes 0.61: 26.52,53.71 v26.52,52.36 U5.1 | 25.42,53.71 26.52,53.71 | 26.52,53.71 28.02,53.71 29.03,53.71 | 23.62,53.21 23.62,53.71 | 23.62,53.71 23.62,54.26 | 23.62,53.71 24.87,53.71 25.32,54.16 C30.1
  Top-VerticalRoutes 0.813: 41.92,31.03 v41.92,32.51
  Top-VerticalRoutes 1.016: J6.6 arc-90 32.92,10.32
  Top-VerticalRoutes 1.422: J6.8 J6.6 | 32.92,10.32 v32.92,11.91
  BottomnHorizontalroutes 0.2: v16.55,44.61 15.9,44.61 15.85,44.56 14.85,44.56 U100.2 | C111.2 13.4,39.86 13.4,40.09 13.52,40.21 | C125.2 32.2,35.56 v32.2,36.76 | C124.1 29,35.76 27.9,36.86 v27.1,36.86 | C129.2 R119.1 38.15,35.86 SV2.5 | C126.1 29.6,29.31 v31.2,29.31 | IC4.5 39.12,38.11 39.62,37.61 39.62,36.91 | C31.2 27.71,50.52 26.52,51.71 v26.52,52.36 | C36.2 v19.22,53.51 | 13.52,40.96 v13.43,41.05
  BottomnHorizontalroutes 0.254: IC4.2 35.09,43.78 35.22,43.78 35.22,44.31 35.72,44.81 37.22,44.81 37.52,44.51 37.52,42.87 IC4.4 IC4.5 IC4.6 | 39.62,35.91 SV2.5 | 33.8,21.56 33.75,21.51 | 32.12,21.51 32.1,21.53 C128.2
  BottomnHorizontalroutes 0.35: C128.2 32.15,21.56 | 33.8,21.56 34.1,21.86 v34.1,22.66 | C127.2 32.05,27.96 31.72,28.21 31.47,28.46 v30.5,28.46
  BottomnHorizontalroutes 0.406: 48.52,28.96 D1.1 | 43.62,28.96 D3.1 43.37,31.41 42.92,31.41 41.92,32.41 v41.92,32.51 | 33.75,21.51 32.12,21.51 | 13.52,40.21 13.52,40.96 | R3.1 46.77,27.11 44.02,27.11 43.42,27.71 43.42,28.41 43.67,28.66 R5.1 | R8.1 48.32,11.71 v47.72,11.11 47.17,11.11 46.27,12.01
  BottomnHorizontalroutes 0.61: v32.92,11.91 32.92,12.31 31.67,13.56 31.67,14.11 31.57,14.11 C1.2 | D4.1 46.27,12.01
  other vias: 28.72,1.61
  pour GND: 28.72,56.21 35.12,56.01 40.82,53.71 45.42,51.11 49.82,46.81 51.62,43.11 53.62,39.71 54.92,36.51 55.82,32.51 56.32,27.91 55.82,24.41 54.62,19.61 53.22,16.21 50.52,11.71 47.32,8.61 45.22,6.41 40.12,3.91 35.92,2.11 30.52,1.41 24.12,1.41 18.12,3.41 10.32,8.51 6.12,14.71 3.12,21.11 1.52,27.21 1.72,33.81 3.62,39.71 8.52,47.21 13.62,50.81 19.12,54.21 21.62,55.21 23.72,55.81 25.02,56.31 27.82,56.51
HI-2-SET-RELAYS  (via drill 0.3)
  Top-VerticalRoutes 0.2: U4.36 23.41,31.72 v23.52,31.71 | J1.13 v32.02,47.01
  BottomnHorizontalroutes 0.2: v23.52,31.71 23.02,32.21 23.02,44.91 25.12,47.01 v32.02,47.01
HI-4-RELAY-RESET  (via drill 0.3)
  Top-VerticalRoutes 0.2: U4.37 20.72,31.21 v20.02,31.91 | J1.16 33.22,54.71 31.72,54.71 30.42,52.41 v28.42,52.41
  BottomnHorizontalroutes 0.2: v20.02,31.91 20.02,38.01 20.82,38.81 20.82,48.31 26.02,53.51 27.32,53.51 v28.42,52.41
ID  (via drill 0.3)
  Top-VerticalRoutes 0.2: U4.11 34.12,30.7 v34.72,31.31
  BottomnHorizontalroutes 0.2: v34.72,31.31 34.72,32.83 C129.1 R119.2 37.52,33.31 37.12,32.71 37.12,29.99 R118.2
KB3  (via drill 0.3)
  Top-VerticalRoutes 0.2: IC2.5 36.82,14.71 37.62,13.91 v40.72,13.91 | v47.72,40.61 46.39,41.41 J1.1
  BottomnHorizontalroutes 0.2: v47.72,40.61 50.02,40.61 51.32,39.31 51.32,32.01 D1.3 50.47,31.76 R3.2 51.62,28.36 51.62,12.61 48.62,9.61 45.02,9.61 v40.72,13.91
KEY_BT  (via drill 0.3)
  Top-VerticalRoutes 0.2: K1.6 44.42,23.17 v44.42,18.81
  Top-VerticalRoutes 0.254: U4.53 25.85,17.28 v26.57,16.56 26.52,16.61
  BottomnHorizontalroutes 0.2: v44.42,18.81 43.62,19.61 40.22,19.61 39.22,18.61 28.62,18.61 v26.57,16.56
MCLR  (via drill 0.3)
  Top-VerticalRoutes 0.2: C7.1 R7.2 38.05,23.24 38.15,23.24 v38.62,23.61
  BottomnHorizontalroutes 0.2: R32.1 47.44,36.01 SV2.2 45.64,34.21 42.12,34.21 38.42,30.51 38.42,24.91 38.62,24.71 v38.62,23.61
MR_STEP  (via drill 0.3)
  Top-VerticalRoutes 0.2: RN6.3 37.7,26.81 v40.02,26.81 | v47.92,26.41 47.92,22.21 47.72,22.01 47.22,22.01 46.92,21.71 46.92,20.91 46.88,20.87 K1.11
  BottomnHorizontalroutes 0.2: v40.02,26.81 40.62,26.21 44.92,26.21 45.12,26.41 v47.92,26.41
N$4
  Top-VerticalRoutes 0.254: IC2.9 R10.1 44.67,14.11
  Top-VerticalRoutes 0.406: 46.22,14.21 46.22,13.36 R13.2 | R12.2 46.77,14.76 46.22,14.21 | 46.22,14.21 44.77,14.21 R10.1
N$5
  Top-VerticalRoutes 0.2: U4.64 31.36,23.27 31.72,22.91 32.62,22.91 32.82,22.71 32.82,21.63 RN5.2
N$6  (via drill 0.3)
  Top-VerticalRoutes 0.254: v31.22,1.41 31.22,3.68 J6.7
  BottomnHorizontalroutes 0.2: 29.92,9.21 29.92,2.71
  BottomnHorizontalroutes 0.254: R11.2 22.22,18.51 22.92,17.81 22.92,10.71 23.62,10.01 29.12,10.01 29.92,9.21 | 29.92,2.71 v31.22,1.41
N$7
  Top-VerticalRoutes 0.2: IC2.6 35.62,14.01 35.62,13.41 IC2.7 34.92,13.41 29.82,18.51 29.82,20.13 RN4.8
N$8
  Top-VerticalRoutes 0.2: RN1.2 10.72,14.11 10.72,15.21 11.02,15.51 11.02,18.21 11.92,19.11 16.12,19.11 IC1.7
N$9
  Top-VerticalRoutes 0.2: J1.2 51.21,44.33 51.22,42.71 55.02,38.91 55.02,33.71 51.52,30.21 51.52,25.41 51.97,24.96 51.97,22.81 | 51.97,22.81 51.97,18.41 | 51.97,18.41 51.97,18.36 49.72,16.11 47.42,16.11 47.22,16.31 45.62,16.31 44.82,15.51 43.82,15.51 43.02,14.71 IC2.10 | R4.2 53.27,18.41 51.97,18.41 | D2.3 51.97,22.81
N$10  (via drill 0.3)
  Top-VerticalRoutes 0.2: U4.56 27.35,25.64 28.02,26.31 29.25,26.31 v29.3,26.36
  BottomnHorizontalroutes 0.2: v29.3,26.36 29.32,26.36 29.82,25.81 29.8,25.79 29.8,24.96 30.9,23.91
  BottomnHorizontalroutes 0.254: 30.9,23.91 C128.1
N$11  (via drill 0.3)
  Top-VerticalRoutes 0.2: J1.4 47.62,46.91 47.62,45.98 46.72,44.58 46.72,44.17 48.32,43.17 48.52,43.17 54.42,37.31 54.42,33.91 50.92,30.41 50.92,24.81 51.52,24.21 51.52,18.91 49.42,16.81 v47.72,16.81 45.42,16.81 44.62,16.01 IC2.12
  BottomnHorizontalroutes 0.406: D4.3 45.37,14.56 R8.2 47.72,15.16 v47.72,16.81
N$13
  Top-VerticalRoutes 0.2: RN4.7 29,18.43 34.52,12.91 41.12,12.91 41.62,13.41
  Top-VerticalRoutes 0.254: R10.2 44.62,12.41 43.32,12.41 42.32,13.41 IC2.8 41.62,13.41
N$14
  Top-VerticalRoutes 0.2: RN5.6 32.02,19.59 32.02,18.71 34.02,16.71 35.52,16.71 | IC2.2 36,16.71
  Top-VerticalRoutes 0.254: 36,16.71 35.52,16.71 35.52,17.21 35.62,17.31 IC2.1
N$15  (via drill 0.3)
  Top-VerticalRoutes 0.2: v33.32,16.21 31.22,18.29 31.22,19.69 RN5.5 | v38.82,16.21 39.32,16.71 41.64,16.71 41.89,16.66 IC2.13 42.37,16.66 42.42,16.71 42.42,17.31 IC2.14
  BottomnHorizontalroutes 0.2: v38.82,16.21 v33.32,16.21
N$16
  Top-VerticalRoutes 0.2: U4.43 20.43,28.21 19.62,27.41 19.62,25.31 19.22,24.91 14.7,24.91 RN2.4
N$17
  Top-VerticalRoutes 0.2: U4.7 32.04,28.7 31.7,28.36 31.7,25.36 32.9,24.16 33.9,24.16 34.35,23.71 35.22,23.71 35.45,23.48 R7.1
N$18
  Top-VerticalRoutes 0.2: 17.5,28.86 18.7,28.86 19.55,29.71 U4.40 | 17.5,28.86 14.67,28.86 R6.2 13.41,28.62 13.15,28.36 C14.1 | Q1.1 17.5,28.86
N$19  (via drill 0.3)
  Top-VerticalRoutes 0.2: IC2.3 37.21,16.01 39.52,18.31 v39.52,22.31 | J1.3 43.86,41.25 43.82,41.21 43.82,39.61 44.82,38.61 50.62,38.61 51.02,38.21 51.02,34.51 49.72,33.21 45.92,33.21 45.02,32.31 v45.02,30.71 45.02,29.11 45.82,28.31 47.92,28.31 48.62,27.61 v48.62,24.61
  BottomnHorizontalroutes 0.2: v45.02,30.71 45.12,30.81 45.82,30.81 | v39.52,22.31 46.32,22.31 v48.62,24.61
  BottomnHorizontalroutes 0.406: R5.2 45.82,29.16 45.82,30.81 D3.3
N$22
  Top-VerticalRoutes 0.254: U4.8 34.22,29.21 34.42,29.41 34.42,30.01 34.92,30.51 36.1,30.51 RN10.6
N$26
  Top-VerticalRoutes 0.254: C2.1 35.47,35.21 R9.2
N$34  (via drill 0.3)
  Top-VerticalRoutes 0.2: U4.12 33.26,31.26 31.92,31.26 27.07,26.41 23.62,26.41 v23.57,26.36 | R51.1 5.22,34.91 5.22,32.11 6.32,31.01 6.32,27.91 9.32,24.91 v9.52,24.91
  BottomnHorizontalroutes 0.2: v23.57,26.36 21.32,24.11 10.32,24.11 v9.52,24.91
N$35
  Top-VerticalRoutes 0.406: D14.A 2.86,35.37 R51.2 2.77,37.5 TR1.1
N$39
  Top-VerticalRoutes 0.2: U4.39 19.54,30.22 19.1,30.66 19.1,30.76 18.95,30.91 Q1.2 16.1,30.91 15.7,30.51 R6.1 14.19,30.76 C20.1
N$42
  Top-VerticalRoutes 0.2: RN1.4 9,15.16 9.5,15.66 9.7,15.66 10.1,16.06 10.1,17.76 10,17.86 9.97,17.82 IC1.3
N$46  (via drill 0.3)
  Top-VerticalRoutes 0.2: U4.13 31.83,31.72 27.32,27.21 23.57,27.21 v23.52,27.36 | D14.C arc144 7.12,32.81 | v9.52,26.01 7.06,28.47 7.06,32.56 D14.C | D14.C 6.66,35.37 C39.1
  BottomnHorizontalroutes 0.2: v23.52,27.36 23.47,27.26 20.87,24.66 10.92,24.66 10.32,25.26 v9.52,26.01
N$48
  Top-VerticalRoutes 0.2: U4.49 23.75,23.76 23,23.76 22.6,23.36 RN3.2
N$49
  Top-VerticalRoutes 0.2: RN3.3 21.8,23.46 23.5,25.16 24,25.16 24.36,24.8 24.36,24.75 24.35,24.74 U4.50
N$62
  Top-VerticalRoutes 0.2: IC3.1 14.9,42.16 15.5,41.56 17.8,41.56 18,41.76 R33.1
  Top-VerticalRoutes 0.35: IC3.1
N$108
  Top-VerticalRoutes 0.2: U4.29 25.34,37 25.7,37.36 25.7,37.66 25.9,37.86 RN8.8
N$109
  Top-VerticalRoutes 0.2: U4.30 24.86,37.12 25.1,37.36 RN8.7
N$110
  Top-VerticalRoutes 0.2: U4.31 24.35,38.16 RN8.6
N$111
  Top-VerticalRoutes 0.2: U4.32 23.84,37.02 23.5,37.36 RN8.5
N$116
  Top-VerticalRoutes 0.2: 23.45,21.36 RN3.1 23.95,21.41 24.9,22.36 24.9,23.8 U4.51
N$119
  Top-VerticalRoutes 0.2: RN3.4 21,23.46 22,24.46 22,25.69 U4.48
N$124
  Top-VerticalRoutes 0.2: U4.2 34.65,26.21 34.9,25.96 RN6.7
N$125
  Top-VerticalRoutes 0.2: U4.3 35.91,26.72 RN6.6
N$126
  Top-VerticalRoutes 0.2: U4.4 34.84,27.2 35.2,27.56 RN6.5
N$127
  Top-VerticalRoutes 0.2: U4.1 33.22,25.71 34.35,25.71 34.9,25.16 RN6.8
N$128
  Top-VerticalRoutes 0.2: U4.5 34.75,27.71 35.2,28.16 35.8,28.16 35.9,28.26 35.9,28.81 RN10.8
N$129
  Top-VerticalRoutes 0.2: U4.6 34.65,28.21 34.9,28.46 34.9,29.46 35.1,29.66 RN10.7
N$130
  Top-VerticalRoutes 0.2: U4.21 29.35,36.21 29.5,36.36 30.1,36.36 30.3,36.56 RN9.8
N$131
  Top-VerticalRoutes 0.2: U4.22 28.85,36.5 29.1,36.76 29.3,36.76 29.5,36.96 RN9.7
N$132
  Top-VerticalRoutes 0.2: U4.23 28.36,36.92 28.7,37.26 RN9.6
N$133
  Top-VerticalRoutes 0.2: U4.24 27.85,38.16 RN9.5
N$134
  Top-VerticalRoutes 0.2: 29.85,23.84 U4.61 29.82,23.81 29.82,21.43 RN4.1 29.8,21.23
N$135
  Top-VerticalRoutes 0.2: RN4.2 29,22.29 29.32,22.61 29.32,23.81 U4.60
N$136
  Top-VerticalRoutes 0.2: RN4.3 28.32,21.41 28.32,21.51 28.3,22.19 28.82,22.71 28.82,23.82 U4.59
N$137
  Top-VerticalRoutes 0.2: U4.58 28.36,22.85 28.12,22.61 27.72,22.61 27.52,22.41 27.52,21.33 RN4.4
N$139
  Top-VerticalRoutes 0.2: RN5.3 32.2,21.73 32.02,21.91 32.02,22.21 31.82,22.41 31.32,22.41 30.82,22.91 30.82,23.81 U4.63
N$140
  Top-VerticalRoutes 0.2: U4.62 30.34,22.59 31.32,21.61 31.32,21.49 RN5.4
N$921
  Top-VerticalRoutes 0.2: U4.45 21.98,27.21 20.85,27.21 20.4,26.76 20.4,24.36 19.4,23.36 RN2.2
N$931
  Top-VerticalRoutes 0.2: U4.44 20.55,27.71 20,27.16 20,24.86 19.4,24.26 14.85,24.26 RN2.3
N$9121
  Top-VerticalRoutes 0.2: U4.46 21.06,26.72 20.8,26.46 20.8,23.86 19.6,22.66 15.2,22.66 RN2.1
NEMATX  (via drill 0.3)
  Top-VerticalRoutes 0.2: IC3.4 15.85,46.51 v19.2,46.51 | RN8.3 24.3,40.66 24.72,41.11 24.72,41.71 24.42,42.01 20.42,42.01 v20.12,41.76
  BottomnHorizontalroutes 0.2: 19.2,45.46 v19.2,46.51 | U100.1 16.8,45.86 17.2,45.46 19.2,45.46 | 19.2,45.46 19.47,45.46 20.12,44.81 v20.12,41.76
NETBUSY  (via drill 0.3)
  Top-VerticalRoutes 0.2: v21.17,11.66 21.22,11.66 21.22,10.41 21.05,10.41 J6.16 | RN2.8 13.02,22.51 v11.52,22.51
  BottomnHorizontalroutes 0.2: v11.52,22.51 14.17,22.51 21.17,15.81 v21.17,11.66
NETRX  (via drill 0.3, 0.5)  (2 unrouted)
  Top-VerticalRoutes 0.2: 10.62,23.36 RN2.7 | 22.32,2.21 v22.27,2.21 21.32,3.16 21.22,3.21 21.05,3.38 J6.15 | 21.12,3.71 21.12,4.31
  BottomnHorizontalroutes 0.2: v10.62,23.41 16.17,23.41 22.32,17.26 22.32,2.26 v22.27,2.21
NETTX  (via drill 0.3)
  Top-VerticalRoutes 0.2: 23.37,40.36 23.37,40.04 RN8.4 23.5,40.23 23.52,40.91 v24.07,41.41 | v24.82,11.81 24.82,4.41 24.42,4.01 23.91,4.01 J6.13
  BottomnHorizontalroutes 0.2: v24.07,41.41 24.07,35.16 25.32,33.91 25.32,25.41 23.82,23.91 23.82,12.71 24.62,11.91 v24.82,11.81 28.05,11.81 R63.2
NMEA1  (via drill 0.3)
  Top-VerticalRoutes 0.2: 39.42,45.61 39.42,44.69 J1.7 39.25,44.41 38.52,44.41 37.52,43.41 32.02,43.41 30.73,44.7 v30.73,46.24 | RN2.6 12.9,24.21 11.92,24.21 11.52,24.61 v11.52,25.36
  BottomnHorizontalroutes 0.2: v11.52,25.36 19.92,25.36 23.17,28.61 23.82,28.61 24.22,29.01 24.22,32.11 23.42,32.91 23.42,44.41 24.77,45.76 25.12,46.11 25.25,46.24 v30.73,46.24
NMEA-OUT-A  (via drill 0.3)
  Top-VerticalRoutes 0.2: J1.11 34.58,46.71 33.72,46.71 v33.52,46.91 | v12.62,46.91 12.72,46.91 13.32,47.51 v22.12,47.51
  Top-VerticalRoutes 0.254: IC3.6 11.76,45.25 12.62,46.11 v12.62,46.91
  BottomnHorizontalroutes 0.2: v33.52,46.91 32.42,48.01 27.82,48.01 | 27.82,48.01 24.12,48.01 23.62,47.51 v22.12,47.51 | U100.7 11.41,44.59 12.62,45.81 v12.62,46.91 | C31.1 27.82,48.01
NMEA-OUT-B  (via drill 0.3)
  Top-VerticalRoutes 0.2: J1.12 v39.12,54.01 | 12.82,45.01 v12.87,45.06
  Top-VerticalRoutes 0.254: IC3.7 11.79,43.97 12.82,45.01
  BottomnHorizontalroutes 0.2: U100.6 9.91,43.31 11.12,43.31 v12.87,45.06 13.22,45.41 13.22,46.51 13.72,47.01 18.52,47.01 18.57,47.06 24.39,52.84 | v39.12,54.01 39.12,54.11 36.42,55.51 27.06,55.51 24.39,52.84 | C36.1 23.82,53.51 24.39,52.94 24.39,52.84
NMEA_EN  (via drill 0.3)
  Top-VerticalRoutes 0.2: IC3.3 15.86,45.25 16.42,45.81 19.62,45.81 20.42,45.01 20.42,43.01 20.62,42.81 v27.22,42.81 | RN10.3 38.77,30.46 38.92,30.61 38.92,32.11 v41.02,34.21
  BottomnHorizontalroutes 0.2: v41.02,34.21 41.02,42.31 37.82,45.51 29.92,45.51 v27.22,42.81
PGC
  Top-VerticalRoutes 0.2: U4.17 31.3,35.13 31.3,36.86 31.6,37.16 31.6,37.54 32.67,38.61 41.22,38.61 42.17,37.66 42.17,36.4 SV2.4
PGD
  Top-VerticalRoutes 0.2: U4.18 30.85,37.21 31.1,37.46 31.1,37.96 32.35,39.21 42.02,39.21 44.75,36.48 SV2.3
PHY-POWER  (via drill 0.3)
  Top-VerticalRoutes 0.2: U4.15 31.62,32.71 30.47,31.56 27.27,31.56 26.42,30.71 v26.42,28.21 | v25.62,13.31 27.42,11.51 27.42,4.31 27.02,3.91 26.35,3.91 J6.11
  BottomnHorizontalroutes 0.2: v26.42,28.21 26.42,24.61 24.92,22.91 24.92,14.01 v25.62,13.31
PHY_CS  (via drill 0.3)
  Top-VerticalRoutes 0.2: RN8.1 26,40.16 26,40.99 26.12,41.11 v26.2,41.16 | J6.12 26.02,9.91 26.02,11.91 v24.52,13.41
  BottomnHorizontalroutes 0.2: v26.2,41.16 25.72,40.68 25.72,25.11 24.32,23.71 24.32,13.91 24.52,13.61 v24.52,13.41
PHY_INT  (via drill 0.3)
  Top-VerticalRoutes 0.254: U4.42 22.93,28.7 23.42,28.21 24.02,28.21 v24.22,28.01
  BottomnHorizontalroutes 0.254: v24.22,28.01 24.32,27.91 24.32,25.91 22.82,24.41 22.82,23.66 R11.1
PHY_SCK  (via drill 0.3)
  Top-VerticalRoutes 0.2: U4.33 24.17,33.21 24.47,32.91 v24.32,33.11 | J6.14 23.59,11.48 v23.62,11.51
  BottomnHorizontalroutes 0.2: v24.32,33.11 24.92,32.51 24.92,25.71 23.42,24.11 23.42,12.31 23.62,12.11 v23.62,11.51
PHY_SI  (via drill 0.3)
  Top-VerticalRoutes 0.2: 35.02,4.41 35.02,6.31 35.52,6.81 39.62,6.81
  Top-VerticalRoutes 0.254: RN6.1 38.87,25.16 39.32,24.71 v41.12,24.71 | v50.82,14.71 50.82,11.71 48.42,9.31 42.12,9.31 39.62,6.81 | 35.02,4.41 34.72,4.11 34.17,4.11 J6.5
  BottomnHorizontalroutes 0.254: v41.12,24.71 45.62,24.71 46.02,24.31 47.22,24.31 49.22,26.31 50.42,26.31 50.82,25.91 v50.82,14.71
PHY_SO  (via drill 0.3)
  Top-VerticalRoutes 0.2: 25,40.01 RN8.2 25.1,40.79 25.42,41.11 v25.42,41.71
  Top-VerticalRoutes 0.254: v26.92,13.11 26.92,12.95 28.44,11.43 28.44,10.12 J6.10
  BottomnHorizontalroutes 0.2: v25.42,41.71 25.72,42.01 26.52,42.01 27.02,41.51 27.02,38.61 26.42,38.01 26.42,30.41 27.12,29.71 27.12,24.11 26.52,23.51 26.52,19.51 25.32,18.31 25.32,14.71 v26.92,13.11
RB8
  Top-VerticalRoutes 0.2: 30.42,40.11 38.82,40.11 41.76,43.05 J1.5
  Top-VerticalRoutes 0.254: RN9.1 30.42,39.91 30.42,40.11
RB9
  Top-VerticalRoutes 0.2: 29.62,46.21 31.02,47.61 31.03,47.84 34.53,53.74 34.62,53.91 35.02,53.91 35.42,53.71 J1.14
  Top-VerticalRoutes 0.254: RN9.2 29.62,39.91 29.62,46.21
RB10  (via drill 0.3)
  Top-VerticalRoutes 0.2: 28.8,40.01 RN9.3 28.7,42.29 v28.82,42.41 | J1.6 44.46,48.53 43.2,48.53 39.82,42.67 33.02,42.61 v30.82,42.61
  BottomnHorizontalroutes 0.2: v30.82,42.61 29.05,42.61 28.85,42.41 v28.82,42.41
RB11
  Top-VerticalRoutes 0.2: 28.02,39.91 28.02,45.91 29.82,47.71 29.82,49.13 J1.15
  Top-VerticalRoutes 0.254: RN9.4 28.02,39.91
ROTARY_SW  (via drill 0.3)
  Top-VerticalRoutes 0.2: v35.02,19.41 34.02,18.41 33.12,18.41 32.82,18.71 32.82,19.69 RN5.7 | J1.9 36.05,44.71 v32.62,44.71
  BottomnHorizontalroutes 0.2: v35.02,19.41 35.02,23.91 33.62,25.31 33.62,34.71 33.12,35.21 33.12,36.91 32.02,38.01 32.02,40.31 31.74,40.61 31.74,42.11 32.62,43.01 v32.62,44.71
RST_BT  (via drill 0.3)
  Top-VerticalRoutes 0.2: K1.8 45.42,23.17 v45.42,18.81
  Top-VerticalRoutes 0.254: U4.52 25.34,16.69 v26.52,15.51
  BottomnHorizontalroutes 0.2: v45.42,18.81 44.72,18.11 29.12,18.11 v26.52,15.51
RX-FROM-TERMINAL
  Top-VerticalRoutes 0.2: J2.3 18.94,35.8 arc45 19.1,35.56 19.1,35.66 20.4,34.36 22.7,34.36 23.2,33.86 26.2,33.86 26.4,34.06 26.4,35.07 arc45 U4.27
RX_BT  (via drill 0.3)
  Top-VerticalRoutes 0.2: U4.54 26.36,17.97 28.72,15.61 31.02,15.61 34.22,12.41 41.82,12.41 44.22,10.01 47.92,10.01 50.02,12.11 v50.02,12.21
  Top-VerticalRoutes 0.254: v50.02,25.41 49.42,24.81 49.42,23.25 K1.16
  BottomnHorizontalroutes 0.2: v50.02,25.41 v50.02,12.21
SI_FL
  Top-VerticalRoutes 0.2: IC1.5 20.77,16.55 22.52,18.31 22.52,19.63 RN3.7
SO_FL
  Top-VerticalRoutes 0.2: IC1.2 7.87,19.09 7.7,19.26 7.7,21.26 8.2,21.76 16,21.76 16.5,22.26 19.6,22.26 20.2,21.66 20.2,19.86 20.3,19.76 20.95,19.76 RN3.5
SS_STEP  (via drill 0.3)
  Top-VerticalRoutes 0.2: 37.7,26.01 39.62,26.01 v39.92,25.71 | K1.9 45.88,25.65 v45.72,25.71
  Top-VerticalRoutes 0.254: 37.7,26.01 RN6.2
  BottomnHorizontalroutes 0.2: v39.92,25.71 v45.72,25.71
TX-TO-TERMINAL
  Top-VerticalRoutes 0.2: J2.1 13.66,35.58 arc45 13.72,35.44 15.22,33.95 19.72,33.96 20.92,32.76 21.87,32.76 arc-45 U4.34
TX_BT  (via drill 0.3)
  Top-VerticalRoutes 0.2: U4.55 26.84,22.73 26.72,22.61 26.72,18.71 v28.72,16.71 | v49.12,17.61 49.52,18.01 49.52,21.51 48.38,22.67 K1.14
  BottomnHorizontalroutes 0.2: v28.72,16.71 29.62,17.61 v49.12,17.61
VREF  (via drill 0.3)
  Top-VerticalRoutes 0.254: U4.16 33.21,35.5 v33.92,36.21 33.92,37.41 34.22,37.71 34.87,37.71 R9.1
  BottomnHorizontalroutes 0.254: v33.92,36.21 33.92,37.31 | IC4.8 33.82,38.04 33.92,37.41 33.92,37.31 | IC4.7 34.92,38.11 34.92,37.31 33.92,37.31

## Text on the board
Top-VerticalRoutes: TOP COPPER
GND: INNER COPPER #1
3V3&5V: INNER COPPER #2
BottomnHorizontalroutes: ANAL_2_CPU | REV 1.0 | (c) 2016 | A+T INSTRUMENTS LTD | BOTTOM COPPER
tNames: TOP SILK
bNames: BOTTOM SILK
tStop: TOP RESIST
bStop: BOTTOM SOLDER RESIST
tCream: TOP PASTE MASK
bCream: BOTTOM PASTE MASK